# Altium PCB ChassisPowerDistribution_B_2.0_RW.PcbDoc (part 2 of 2)
Units mil, origin at the board's own origin, x right, y up, seen from the top; angles counter-clockwise.
Board outline 15750 x 2250 mil, 4 copper layers (Top Layer, Mid Top Layer, Mid Bottom Layer, Bottom Layer), stack 23.756 mil thick; 164 components, 75 nets, 526 pads, 63 vias.
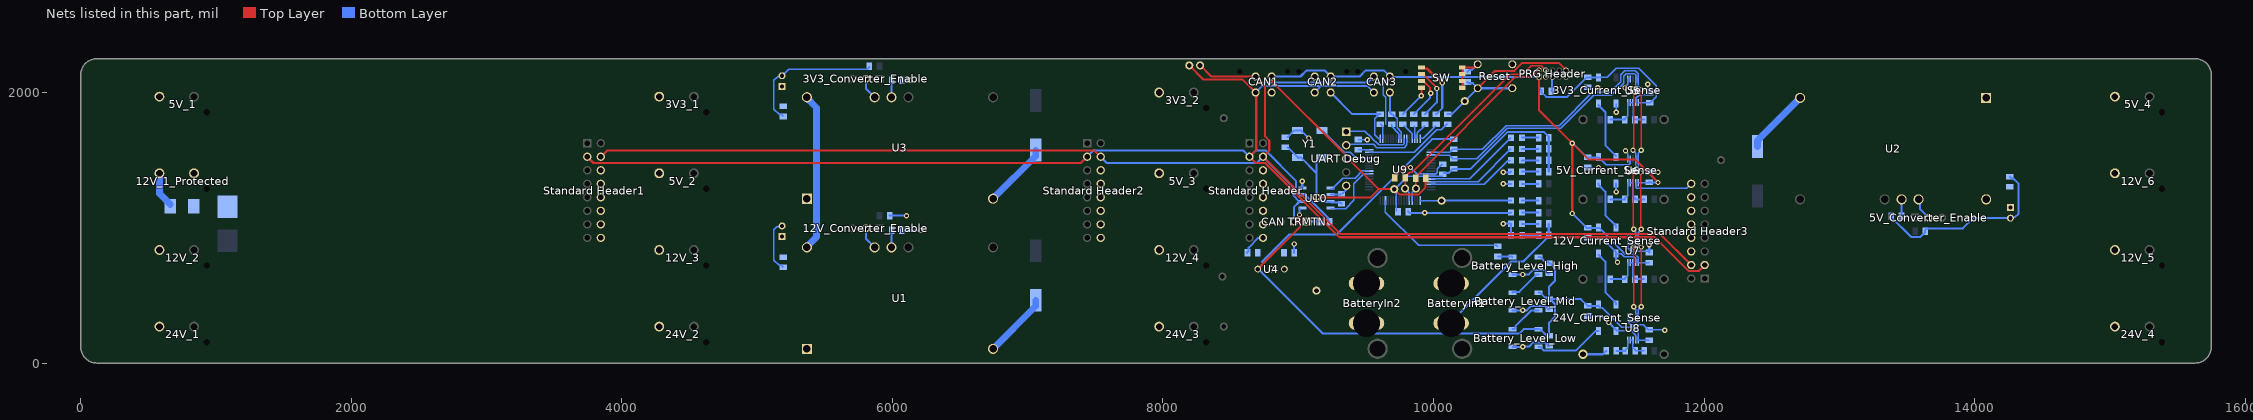
[diagram p4: the nets of this part, all layers, seen from the top]

## Via types
v1: diameter 39.37, hole 19.68, Top Layer to Bottom Layer, 47 vias
v2: diameter 240, hole 126, Top Layer to Bottom Layer, 16 vias

## Nets (pads, with @x,y where several pads share a name; then routed paths per layer and width w, separated by ;. In a path a pad name is that pad's centre, name@x,y a point inside that pad or via, vN(x,y) a via of type N, cw(c..) or ccw(c..) an arc to the next point about the centre after c; other vN are vias at no path point) (continued)
+5: 3V3_Current_Sense.1 5V_Board.1 5V_Current_Sense.1 12V_Current_Sense.1 24V_Current_Sense.1 "CAN PWR.1" "PRG Header.1" "UART Debug.3" Battery_Level_High.1 Battery_Level_Low.1 Battery_Level_Mid.1 C11.2 C16.2 C17.2 C18.2 C19.2 C20.1 C21.1 C22.1 C25.1 C26.2 C27.1 C28.1 C29.1 C30.1 C31.1 C32.1 C33.1 C34.1 C35.2 CAN1.2 CAN2.2 CAN3.2 R20.2 R21.1 R31.1 R32.2 R33.2 R34.2 R36.2 U4.3 U5.6 U6.2 U6.6 U7.6 U8.6 U9.11 U9.26 U9.50 U9.56 U10.3 U10.5 Y1.1 Y1.4 | length 18502.8
  Top Layer w15: U4.3@8701.57,695 9015.03,1008.45 v1@9015.03,1092.67 ; CAN1.2@8803.11,2118.11 8809.62,2111.6 8809.62,2080.38 9346.19,1543.81 9346.19,1531.26 9352.45,1525 9355,1525 9595,1285 ; v1(9010,1095) v1@9014.66,1090.34 ; 9135,1225 9535,1225 9595,1285 ; R36.2@9942.4,1365 9942.4,1298.05 9888.85,1244.5 9750.5,1244.5 5V_Board.1@9710,1285 9595,1285 ; 10780,2115 10780,1870 v1(11025,1625) v1@11025.78,1624.22 ; v1@11025.78,1105.78 v1@11025.78,1624.22 ; v1(11660,1335) 11490,1505 11145,1505 v1@11025.78,1624.22
  Bottom Layer w11: C25.1@9607.5,1765 9610.26,1765 9625.43,1749.83 U9.50@9625.43,1657.91 ; 9650,1765 9648.56,1766.44 9648.56,1966.44 9630,1985 9630,2070 CAN3.2@9677.72,2117.72 ; C22.1@9690,1765 9690,1749.23 9743.26,1695.98 9743.26,1658.19 U9.56@9743.54,1657.91 ; C21.1@9723.85,1121.25 U9.26@9723.85,1201.15 9723.85,1257.89 9710,1271.74 5V_Board.1@9710,1285 9715,1285 9810.32,1380.32 U9.11@9981.76,1380.32 C20.1@10070,1380.32 ; 3V3_Current_Sense.1@11219.13,2112.4 3V3_Current_Sense.1@11220.08,2111.46 11283.66,2111.46 11350.48,2178.27 11516.73,2178.27 11645,2050 11645,1968.11 11601.89,1925 C16.2@11600,1925 U5.6@11514.06,1925 ; 24V_Current_Sense.1@11220.04,419.65 24V_Current_Sense.1@11220.04,421.14 ; 24V_Current_Sense.1@11220.04,431.46 24V_Current_Sense.1@11220.04,421.14 ; 5V_Current_Sense.1@11220.08,1521.46 11276.01,1465.52 11443.67,1465.52 11454.72,1476.57 U6.2@11454.72,1507.32 ; 12V_Current_Sense.1@11221.81,1003.19 11419,806 11488.39,806 11513.78,780.61 11513.78,742.68 U7.6@11514.06,742.4 C18.2@11594.8,742.4 ; U8.6@11514.06,170 C19.2@11595,170 ; U8.6@11514.06,170.56 11514.06,225.46 11474.52,265 11390,265 11246.08,408.92 11232.26,408.92 24V_Current_Sense.1@11220.04,421.14 ; U6.6@11514.06,1332.4 C17.2@11589.8,1332.4
  Bottom Layer w15: U4.3@8701.57,695 8705,695 9183.26,216.74 10632.82,216.74 10666.03,249.96 Battery_Level_Low.1@10776.46,249.96 ; 8732.4,747.4 8935,950 9285,950 9620,1285 ; CAN1.2@8803.11,2118.11 9017.2,2118.11 9062.7,2163.61 9194.72,2163.61 CAN2.2@9240.22,2118.11 9454.31,2118.11 9499.81,2163.61 9631.83,2163.61 CAN3.2@9677.33,2118.11 ; C26.2@8921.89,1595 Y1.1@9000.39,1516.5 ; Y1.1@9003.9,1520 9019.65,1520 9135,1404.65 ; v1(9010,1095) U10.5@9010,1140.69 ; Y1.4@9185,1520 Y1.4@9175,1520 9169.25,1520 9135,1485.75 9135,1404.65 ; C27.1@9320,1177.6 9311.91,1185.69 9243.64,1185.69 9239.33,1190 9174.25,1190 9139.25,1225 9135,1225 9135,1404.65 ; CAN3.2@9680.44,2115 10780,2115 10780,2034.49 C35.2@10797.6,2016.89 ; 5V_Board.1@9710,1285 9620,1285 ; C20.1@10079.68,1404.68 10112.6,1404.68 10143.11,1435.2 R20.2@10150,1435.2 10274.07,1435.2 10548.18,1709.31 10815.96,1709.31 10852.13,1673.14 R34.2@10852.13,1666.25 R33.2@10852.13,1582.5 R32.2@10852.13,1498.75 R31.1@10852.13,1415 ; R21.1@10150,1654.8 9989.8,1654.8 9620,1285 ; Battery_Level_Mid.1@10776.46,519.96 10788.27,519.96 10835.83,472.4 C29.1@10855,472.4 ; Battery_Level_High.1@10776.46,784.96 10788.27,784.96 10822.66,750.57 10841.83,750.57 C28.1@10855,737.4 10861.89,737.4 10898.06,701.23 10898.06,609.16 10855,566.1 C29.1@10855,472.4 ; Battery_Level_Low.1@10788.27,249.96 10822.66,215.57 10841.83,215.57 C30.1@10855,202.4 10855,298.6 10898.06,341.66 10898.06,436.23 C29.1@10861.89,472.4 ; C35.2@10797.6,2010 10797.6,2003.11 10833.77,1966.94 10987.65,1966.94 11133.11,2112.4 C34.1@11140,2112.4 3V3_Current_Sense.1@11219.13,2112.4 ; v1@11028.11,1105 11133.11,1000 C32.1@11140,1000 12V_Current_Sense.1@11218.62,1000 ; v1@11028.11,1625 11133.11,1520 C33.1@11140,1520 5V_Current_Sense.1@11218.62,1520 ; 24V_Current_Sense.1@11219.57,422.4 C31.1@11140,422.4 11090,472.4 C29.1@10861.89,472.4 ; C17.2@11595,1337.6 11596.3,1336.3 11658.7,1336.3 v1(11660,1335) ; C29.1@10855,472.4 C29.1@10861.89,472.4
  other v1: 11026.56,1105
Battery_LEDs: R35.1 U9.30 | length 1021.8
  Bottom Layer w11: U9.30@9645,1201.15 9645,1115 9890,870 10465,870 R35.1@10475,860
CANH: "Standard Header1.3" "Standard Header2.3" "Standard Header3.3" "Standard Header.3" CAN1.3 CAN2.3 CAN3.3 CANH.1 R38.2 U10.7 | length 11648.7
  Top Layer w15: 3745,1525 3791.01,1478.99 7393.99,1478.99 7440,1525 ; CANH.1@8195,2200 8299.89,2095.11 8589.89,2095.11 CAN1.3@8685,2000 8690,1995 8690,1575 8640,1525 8686.01,1478.99 8756.01,1478.99 9305,930 11634.93,930 11885.94,678.99 11958.99,678.99 12005,725
  Bottom Layer w15: 7440,1525 7486.01,1571.01 8593.99,1571.01 8640,1525 8686.01,1571.01 8759.06,1571.01 8985,1345.07 8985,1267.95 9012.95,1240 U10.7@9030.67,1240 ; CAN1.3@8685,2000 8734.61,2049.61 9171.72,2049.61 ; U10.7@9030.67,1245 9034.98,1240.69 9054.31,1240.69 9219.23,1075.77 9219.23,1058.17 R38.2@9232.4,1045 ; CAN2.3@9122.11,2000 9171.72,2049.61 ; CAN3.3@9559.22,2000 9509.61,2049.61 9171.72,2049.61
CANL: "CAN TRMTN.2" "Standard Header1.4" "Standard Header2.4" "Standard Header3.4" "Standard Header.4" CAN1.4 CAN2.4 CAN3.4 CANL.1 U10.6 | length 11174.5
  Top Layer w15: 3845,1525 3891.01,1571.01 7493.99,1571.01 7540,1525 ; CANL.1@8275,2200 8356.89,2118.11 CAN1.4@8685,2118.11 8755,2048.11 8755,1675.07 8786.01,1644.06 8786.01,1571.01 8740,1525 8742.53,1525 9314.53,953 11677,953 11905,725
  Bottom Layer w15: 7540,1525 7586.01,1478.99 8693.99,1478.99 8740,1525 8960,1305 8960,1242.95 U10.6@9012.95,1190 ; CAN1.4@8685,2118.11 8730.5,2072.61 9162.19,2072.61 ; 8970,1045 8970,1155 9005.69,1190.69 9008.64,1190.69 9010,1192.05 U10.6@9010,1195 ; U10.6@9012.95,1195 U10.6@9030.67,1195 ; CAN2.4@9122.11,2118.11 9167.22,2073 ; 9162.97,2072.61 9513.72,2072.61 CAN3.4@9559.22,2118.11
CANRX: U9.39 U10.4 | length 466.4
  Bottom Layer w11: U10.4@9239.33,1140 9349.72,1140 9411.78,1202.06 9411.78,1326.78 9485,1400 U9.39@9525,1400
CANTX: U9.40 U10.1 | length 340.8
  Bottom Layer w11: U10.1@9239.33,1290 9257.05,1290 9263.36,1296.31 9263.36,1298.36 9330,1365 9420,1365 9474.96,1419.96 9524.72,1419.96 U9.40@9525,1419.69
Current_Sensor_SCL: R21.2 U5.5 U6.5 U7.5 U8.2 U8.5 U9.2 | length 3796.2
  Top Layer w11: v1(11530,1408.19) 11532.5,1405.69 11532.5,992.5 v1(11535,990) ; v1(11535,415) v1(11535,858.19) ; v1(11535,1571.81) 11537.38,1574.19 11537.38,2017.62 v1(11539.76,2020)
  Bottom Layer w11: U9.2@9981.76,1557.48 10120.59,1557.48 10143.11,1580 R21.2@10150,1580 10362.31,1580 10537.31,1755 10930,1755 11175,2000 11305,2000 11385,2080 11385,2130 11414.27,2159.27 11492.91,2159.27 11513.78,2138.41 U5.5@11513.78,2100.48 ; U8.2@11455.28,344.92 11455.28,314.17 11464.33,305.12 11504.73,305.12 11513.78,314.17 11513.78,334.92 U8.5@11513.78,344.92 ; U8.5@11514.06,345.2 11514.06,394.06 v1(11535,415) ; U5.5@11514.06,2100.2 11514.06,2045.7 v1(11539.76,2020) ; v1(11530,1408.19) 11530,1412.87 11514.06,1428.81 U6.5@11514.06,1507.6 11514.06,1550.67 11535,1571.62 v1(11535,1571.81) ; v1(11535,858.19) 11533.98,858.19 11514.06,878.11 11514.06,961.38 11535,982.32 v1(11535,990)
Current_Sensor_SDA: R20.1 U5.4 U6.4 U7.2 U7.4 U8.4 U9.3 | length 3702.5
  Top Layer w11: v1(11475,1408.19) 11477.5,1405.69 11477.5,992.5 v1(11480,990) ; v1(11475,1571.81) 11480,1576.81 11480,2000 v1(11485,2005) ; v1(11480,858.19) 11480.64,857.55 v1@11480.64,416.92
  Bottom Layer w11: U9.3@9981.76,1537.8 10115.31,1537.8 10143.11,1510 R20.1@10150,1510 10319.18,1510 10544.18,1735 10940,1735 11185.57,1980.57 11315.57,1980.57 11405,2070 11405,2120.31 11424.96,2140.27 11485.04,2140.27 11494.09,2131.22 U5.4@11494.09,2100.48 ; U7.2@11455.28,917.32 11455.28,884.64 11478.06,861.85 11480,861.85 11480,863.36 11494.37,877.73 11494.37,967.95 11480,982.32 v1(11480,990) ; v1(11475,1408.19) 11475,1409.44 11494.37,1428.81 U6.4@11494.37,1507.6 11494.37,1550.67 11475,1570.04 v1(11475,1571.81) ; v1@11481.28,408.6 11494.37,395.51 U8.4@11494.37,345.2 ; v1(11485,2005) 11485,2012.68 11494.37,2022.05 U5.4@11494.37,2100.2
  other v1: 11481.28,416.28
Dip1: R22.2 U9.61 | length 127.2
  Bottom Layer w11: R22.2@9775,1750 9787.66,1750 9841.68,1695.98 9841.68,1658.19 U9.61@9841.96,1657.91
Dip2: R23.2 U9.62 | length 94.8
  Bottom Layer w11: R23.2@9855,1750 9861.65,1743.35 U9.62@9861.65,1657.91
Dip3: R24.2 U9.63 | length 117.3
  Bottom Layer w11: U9.63@9881.4,1657.98 9881.4,1700.79 R24.2@9934.06,1753.44
Dip4: R25.2 U9.64 | length 155.9
  Bottom Layer w11: U9.64@9901.42,1660 9923.11,1660 10013.11,1750 R25.2@10020,1750
GND: 3V3_1.1 3V3_2.1 3V3_Current_Sense.3 5V_1.1 5V_2.1 5V_3.1 5V_4.1 5V_Current_Sense.3 12V_1_Protected.1 12V_2.1 12V_3.1 12V_4.1 12V_5.1 12V_6.1 12V_Current_Sense.3 24V_1.1 24V_2.1 24V_3.1 24V_4.1 24V_Current_Sense.3 "3.3V O.1" "5V O.1" "5V PWR.1" "12V O.1" "24V O.1" "PRG Header.3" "PRG Header.5" "PRG Header.9" "PWR In.1" "Standard Header1.6" "Standard Header1.8" "Standard Header1.10" "Standard Header1.12" "Standard Header1.14" "Standard Header1.16" "Standard Header2.6" "Standard Header2.8" "Standard Header2.10" "Standard Header2.12" "Standard Header2.14" "Standard Header2.16" "Standard Header3.6" "Standard Header3.8" "Standard Header3.10" "Standard Header3.12" "Standard Header3.14" "Standard Header3.16" "Standard Header.6" "Standard Header.8" "Standard Header.10" "Standard Header.12" "Standard Header.14" "Standard Header.16" "UART Debug.5" Battery_Level_High.3 Battery_Level_Low.3 Battery_Level_Mid.3 BatteryIn1.1 BatteryIn2.1 C1.2 C2.1 C3.2 C4.2 C5.1 C6.2 C7.2 C8.1 C9.2 C10.1 C11.1 C16.1 C17.1 C18.1 C19.1 C20.2 C21.2 C22.2 C23.1 C24.2 C25.2 C26.1 C27.2 C28.2 C29.2 C30.2 C31.2 C32.2 C33.2 C34.2 C35.1 CAN1.1 CAN2.1 CAN3.1 D1.2 GND.1 R1.1 R2.2 R3.1 R4.2 R5.1 R6.2 R37.1 Reset.1a Reset.1b SW.1 SW.2 SW.3 SW.4 U1.1 U1.7 U2.1 U2.7 U3.1 U3.7 U4.2 U5.1 U5.2 U5.7 U6.1 U6.7 U7.1 U7.7 U8.1 U8.7 U9.10 U9.17 U9.49 U9.57 U10.2 U10.8 Y1.2 | length 12995.1
  Top Layer w11: R37.1@9715.2,1370 9715.2,1376.89 9788.43,1450.12 9824.88,1450.12 v1(9829.88,1445.12) ; SW.1@10212.28,2035 SW.2@10212.28,2085 SW.3@10212.28,2135 SW.4@10212.28,2185
  Top Layer w15: SW.4@10212.28,2185 10306.3,2185 Reset.1a@10328.46,2207.17
  Bottom Layer w11: D1.2@662.99,1160 D1.2@662.99,1171.5 ; C1.2@5185,1013.74 5177.31,1006.05 5146.05,1006.05 5125,985 5125,760 5162.23,722.77 5179.83,722.77 C2.1@5195,707.6 ; C5.1@5195,1822.6 5179.83,1837.77 5162.23,1837.77 5125,1875 5125,2090 5151.05,2116.05 5177.31,2116.05 C4.2@5185,2123.74 5234.2,2172.94 5815.03,2172.94 5830.2,2188.11 R5.1@5830.2,2195 ; R6.2@6069.8,2090 v1(6130,2090) ; C24.2@9445,1652.4 9447.4,1650 v1(9510,1650) ; C25.2@9600.61,1839.8 9566.44,1805.63 9566.44,1688.56 9597.09,1657.91 U9.49@9605.74,1657.91 ; C22.2@9690,1839.8 9696.89,1839.8 9731.44,1805.25 9731.44,1738.74 9763.22,1706.96 U9.57@9763.22,1657.91 ; v1(9829.88,1445.12) 9875,1400 U9.10@9981.76,1400 ; U9.17@9901.02,1200 GND.1@10060,1200 ; U9.10@9982.04,1400.28 10019.83,1400.28 10028.94,1409.39 10028.94,1435.63 C20.2@10063.11,1469.8 ; C33.2@11140,1445.2 11219.8,1445.2 v1(11220,1445) ; C34.2@11140,2037.6 11142.6,2035 v1(11215,2035) ; 24V_Current_Sense.3@11349.96,238.54 11461.46,238.54 11494.09,205.91 U8.7@11494.09,170.28 ; 12V_Current_Sense.3@11350,808.54 11389.59,808.54 11411.13,787 11480.52,787 11494.09,773.43 11494.09,742.68 U7.7@11494.37,742.4 ; v1(11350,1855) 3V3_Current_Sense.3@11350,1918.54 ; v1(11415.97,2034.03) 11415.97,2041.71 11434.91,2060.66 11434.91,2099.79 U5.1@11435.32,2100.2 U5.2@11455,2100.2 ; v1(11420,1570) 11420,1567.32 11435.31,1552.01 U6.1@11435.31,1507.6 ; U8.1@11435.32,345.2 11435.32,307.27 11458.58,284 11549.6,284 C19.1@11591.9,241.7 ; U7.1@11435.31,917.6 11435.31,852.75 11463.07,825 11587.4,825 C18.1@11595,817.4 ; U8.7@11494.09,160.28 U8.7@11494.37,160 ; U5.7@11494.09,1925.28 11494.09,1956.03 ; U6.7@11494.37,1332.4 11494.65,1332.12 11494.65,1301.38 11503.7,1292.33 11871.19,1292.33 11903.86,1325 11905,1325 ; U5.7@11494.37,1925 11494.65,1925.28 11494.65,1956.03 11523.26,1984.63 11584.83,1984.63 C16.1@11600,1999.8 11585,2014.8 v1(11585,2060) ; C19.1@11595,244.8 11595.2,245 11708.62,245 v1(11710.72,242.9) ; C17.1@11595,1412.4 11597.4,1410 v1(11660,1410)
  Bottom Layer w15: R1.1@5979.8,1090 v1(6105,1090) ; R2.2@6069.8,980 v1(6210,980) ; C11.1@8620.2,815 8633.37,828.17 8633.37,853.3 8705.07,925 ; 8705,925 8705.07,925 ; 8740,925 8705.07,925 ; C26.1@8921.89,1669.8 8972.09,1720 9019.65,1720 9075.61,1664.03 v1(9077.07,1664.03) ; C10.1@8970,815 v1(8970,880) ; v1(9030,1345) 9030,1295.67 U10.8@9030.67,1295 ; CAN2.1@9240.22,2000 9400.42,1839.8 9600.61,1839.8 C25.2@9607.5,1839.8 ; U10.2@9243.64,1244.31 C27.2@9311.91,1244.31 ; C27.2@9326.89,1252.4 9355,1280.51 9355,1320 ; CAN3.1@9677.33,2000 9677.33,1852.47 C22.2@9690,1839.8 ; C21.2@9812.4,1120 9822.4,1110 v1(9935,1110) 10569.82,1110 10572.32,1112.5 ; GND.1@10060,1201.25 10572.32,1201.25 ; C23.1@10250,2152.4 10263.17,2165.57 10284.04,2165.57 Reset.1a@10327.05,2208.58 ; v1(10515,1030) 10571.07,1030 10572.32,1028.75 10572.99,1028.08 10572.99,945.67 10573.66,945 ; v1(10515,1325) 10572.32,1325 ; v1(10515,1410) 10567.32,1410 10572.32,1415 ; Battery_Level_Low.3@10583.56,120.02 10664.98,120.02 10667.19,122.19 10707.19,122.19 10738.26,153.26 10822.45,153.26 10848.11,127.6 C30.2@10855,127.6 ; Battery_Level_Mid.3@10583.54,390.04 v1(10660,390.04) 10690.04,390.04 10723.26,423.26 10822.45,423.26 10848.11,397.6 C29.2@10855,397.6 ; Battery_Level_High.3@10583.54,655.04 v1(10660,655.04) 10705.04,655.04 10738.26,688.26 10822.45,688.26 10848.11,662.6 C28.2@10855,662.6 ; C35.1@10872.4,2010 10876.2,2013.8 10876.2,2115 ; C31.2@11140,347.6 11244.21,347.6 v1@11295,296.81 ; C32.2@11140.2,925 11245.35,925 11350,820.35 12V_Current_Sense.3@11350,813.54 ; v1(11295,300) 24V_Current_Sense.3@11353.21,241.79 ; 12V_Current_Sense.3@11350,808.54 11350,761.59 11360,751.59 v1(11360,745) ; v1(11350,1265) 5V_Current_Sense.3@11350,1328.54 ; C18.1@11595,817.4 v1(11595,875) ; U2.7@12710,1959.45 U2.7@12710,1960 ; R4.2@13385.2,1085 13385.2,1078.11 13531.37,931.94 13598.63,931.94 13634.8,968.11 R3.1@13634.8,975 13634.8,981.89 13647.97,995.06 13913.49,995.06 13989.69,1071.26 C7.2@14265,1071.26 14271.92,1078.18 14298.18,1078.18 14325,1105 14325,1325 14285.77,1364.23 14273.17,1364.23 C8.1@14260,1377.4
  Bottom Layer w50: 12V_1_Protected.1@582.2,1402.62 582.2,1252.28 D1.2@662.99,1171.5 ; U1.7@6744.25,104.8 7060,420.55 C3.2@7060,463.86 ; U3.7@6744.25,1214.8 7060,1530.55 C9.2@7060,1573.86 ; C6.2@12395,1601.14 12395,1644.45 U2.7@12710,1959.45
  other v1: 10660,120
"LED CAN": CAN.1 U9.14 | length 658.8
  Bottom Layer w10: U9.14@9981.76,1321.26 10376.26,1321.26 10550,1495 CAN.1@10568.57,1495
"LED Debug": Debug.1 U9.13 | length 690.6
  Bottom Layer w10: U9.13@9981.76,1340.94 10330.77,1340.94 Debug.1@10572.32,1582.5
"LED Fault": Fault.1 U9.12 | length 717.2
  Bottom Layer w11: U9.12@9981.76,1360.63 10266.7,1360.63 Fault.1@10572.32,1666.25
"Net3.3V O_2": "3.3V O.2" R30.2 | length 122.3
  Bottom Layer w15: 10655,1325 R30.2@10777.32,1325
Net3V3_Converter_Enable_2: 3V3_Converter_Enable.2 U3.3 | length 161.6
  Bottom Layer w15: 3V3_Converter_Enable.2@5805,2100 5805,2028.46 U3.3@5868.66,1964.8
Net3V3_Current_Sense_4: 3V3_Current_Sense.4 5V_Current_Sense.2 | length 430.5
  Bottom Layer w15: 3V3_Current_Sense.4@11220.08,1906.73 11271.15,1855.66 11271.15,1608.85 5V_Current_Sense.2@11350,1530
"Net5V O_2": "5V O.2" R29.2 | length 122.3
  Bottom Layer w15: 10655,1201.25 R29.2@10777.32,1201.25
"Net5V PWR_2": "5V PWR.2" R31.2 | length 122.3
  Bottom Layer w15: 10655,1415 R31.2@10777.32,1415
Net5V_Converter_Enable_2: 5V_Converter_Enable.2 U2.3 | length 165.8
  Bottom Layer w15: U2.3@13585.59,1210 13596.82,1198.77 13596.82,1138.18 5V_Converter_Enable.2@13660,1075
Net5V_Current_Sense_4: 5V_Current_Sense.4 12V_Current_Sense.2 | length 380.9
  Bottom Layer w15: 5V_Current_Sense.4@11220.08,1328.54 11220.08,1316.73 11270,1266.81 11270,1093.27 11350,1013.27 12V_Current_Sense.2@11350,1001.46
"Net12V O_2": "12V O.2" R28.1 | length 122.3
  Bottom Layer w15: 10655,1112.5 R28.1@10777.32,1112.5
Net12V_1_Protected_2: 12V_1_Protected.2 D1.1 F13.2
Net12V_Converter_Enable_2: 12V_Converter_Enable.2 U1.3 | length 166.6
  Bottom Layer w15: 12V_Converter_Enable.2@5805,995 5805,918.46 U1.3@5868.66,854.8
Net12V_Current_Sense_4: 12V_Current_Sense.4 24V_Current_Sense.2 | length 422.3
  Bottom Layer w15: 12V_Current_Sense.4@11220.08,799.92 11271.23,748.77 11271.23,522 11349.96,443.27 24V_Current_Sense.2@11349.96,431.46
"Net24V O_2": "24V O.2" R27.2 | length 122.3
  Bottom Layer w15: 10655,1028.75 R27.2@10777.32,1028.75
Net24V_Current_Sense_4: 24V_Current_Sense.4 Battery_Level_Low.2 | length 516.4
  Bottom Layer w15: Battery_Level_Low.2@10776.46,120.04 10788.27,120.04 10816.88,91.43 11051.43,91.43 11198.54,238.54 24V_Current_Sense.4@11220.04,238.54
NetBattery_Level_High_2: Battery_Level_High.2 Battery_Level_Mid.4 | length 248.9
  Bottom Layer w15: Battery_Level_Mid.4@10583.54,519.96 10589.55,525.96 10635.57,525.96 10764.65,655.04 Battery_Level_High.2@10776.46,655.04
NetBattery_Level_High_4: Battery_Level_High.4 R35.2 | length 107.8
  Bottom Layer w15: R35.2@10476.32,786.28 10582.22,786.28 Battery_Level_High.4@10583.54,784.96
NetBattery_Level_Low_4: Battery_Level_Low.4 Battery_Level_Mid.2 | length 257.4
  Bottom Layer w15: Battery_Level_Low.4@10583.54,249.96 10595.35,249.96 10605.57,260.18 10605.57,271.18 10724.43,390.04 Battery_Level_Mid.2@10776.46,390.04
NetC12_1: C12.1 R11.1 U5.10 | length 241.1
  Bottom Layer w11: C12.1@11415.2,1800 11415.2,1806.89 11435.32,1827.01 U5.10@11435.32,1925
  Bottom Layer w15: R11.1@11307.4,1800 C12.1@11415.2,1800
NetC12_2: C12.2 R12.1 U5.8 U5.9 | length 215.8
  Bottom Layer w11: U5.9@11455,1925 U5.8@11474.69,1925 ; U5.8@11474.96,1924.72 11474.96,1815.04 C12.2@11490,1800
  Bottom Layer w15: C12.2@11490,1800 R12.1@11555.2,1800
NetC13_1: C13.1 R13.1 U6.10 | length 238.5
  Bottom Layer w11: C13.1@11415.2,1210 11415.2,1216.89 11435.31,1237.01 U6.10@11435.31,1332.4
  Bottom Layer w15: R13.1@11307.4,1210 C13.1@11415.2,1210
NetC13_2: C13.2 R14.1 U6.8 U6.9 | length 216
  Bottom Layer w11: U6.9@11455,1332.4 U6.8@11474.68,1332.4 11474.68,1232.2 11490,1216.89 C13.2@11490,1210
  Bottom Layer w15: C13.2@11490,1210 R14.1@11557.6,1210
NetC14_1: C14.1 R15.1 U7.10 | length 238.5
  Bottom Layer w11: C14.1@11415.2,620 11415.2,626.89 11435.31,647.01 U7.10@11435.31,742.4
  Bottom Layer w15: R15.1@11307.4,620 C14.1@11415.2,620
NetC14_2: C14.2 R16.1 U7.8 U7.9 | length 216
  Bottom Layer w11: U7.9@11455,742.4 U7.8@11474.68,742.4 11474.68,642.2 11490,626.89 C14.2@11490,620
  Bottom Layer w15: C14.2@11490,620 R16.1@11557.6,620
NetC15_1: C15.1 R17.1 U8.10 | length 145.6
  Bottom Layer w11: C15.1@11417.6,96.89 11435.32,114.61 U8.10@11435.32,170
  Bottom Layer w15: R17.1@11352.4,90 C15.1@11417.6,90
NetC15_2: C15.2 R18.1 U8.8 U8.9 | length 172.2
  Bottom Layer w11: U8.9@11455,170 U8.8@11474.69,170 11474.69,114.61 11492.4,96.89 C15.2@11492.4,90 R18.1@11557.6,90
NetC24_1: C24.1 U9.48 | length 80.2
  Bottom Layer w11: C24.1@9445,1577.6 9445.43,1577.17 U9.48@9525,1577.17
"NetCAN TRMTN_1": "CAN TRMTN.1" R38.1 | length 87.6
  Bottom Layer w15: 9070,1045 R38.1@9157.6,1045
NetCAN_2: CAN.2 R32.1 | length 122.3
  Bottom Layer w15: CAN.2@10655,1498.75 R32.1@10777.32,1498.75
NetDebug_2: Debug.2 R33.1 | length 122.3
  Bottom Layer w15: Debug.2@10655,1582.5 R33.1@10777.32,1582.5
NetFault_2: Fault.2 R34.1 | length 122.3
  Bottom Layer w15: Fault.2@10655,1666.25 R34.1@10777.32,1666.25
"NetPWR In_2": "PWR In.2" R26.1 | length 121
  Bottom Layer w15: 10656.34,945 R26.1@10777.32,945
NetR2_1: R2.1 U1.4 | length 124.9
  Bottom Layer w15: U1.4@5993.86,854.8 5994.43,855.37 R2.1@5994.43,979.43
NetR4_1: R4.1 U2.4 | length 125.2
  Bottom Layer w15: R4.1@13460,1085 13460.2,1085.2 13460.2,1209.8 U2.4@13460.39,1210
NetR6_1: R6.1 U3.4 | length 125.7
  Bottom Layer w15: U3.4@5993.86,1964.8 5994.43,1965.37 5994.43,2089.43 R6.1@5995,2090
NetR19_2: R19.2 U9.47 | length 666
  Bottom Layer w11: U9.47@9525,1557.48 9858.07,1557.48 10025.59,1725 10057.91,1725 10098.11,1765.2 R19.2@10105,1765.2
NetR22_1: R22.1 SW.8 | length 250.5
  Top Layer w15: v1(9910,1975) SW.8@9910,2032.72
  Bottom Layer w15: R22.1@9773.65,1838.65 v1(9910,1975)
NetR23_1: R23.1 SW.7 | length 332.5
  Top Layer w15: SW.7@9912.28,2085 9919.74,2077.54 9932.46,2077.54 9975.34,2034.66 9975.34,1999.66 v1(9980,1995)
  Bottom Layer w15: R23.1@9855,1839.8 9975.34,1960.14 9975.34,1990.34 v1(9980,1995)
NetR24_1: R24.1 SW.6 | length 385.6
  Top Layer w15: SW.6@9912.28,2135 9919.74,2127.54 9932.46,2127.54 10025,2035 v1(10025,2030)
  Bottom Layer w15: R24.1@9937.5,1839.8 10025,1927.3 v1(10025,2030)
NetR25_1: R25.1 SW.5 | length 449.2
  Top Layer w15: SW.5@9912.28,2185 9919.74,2177.54 9952.46,2177.54 10060,2070 v1(10065,2070)
  Bottom Layer w15: R25.1@10020,1839.8 10065,1884.8 v1(10065,2070)
Oscillator: U9.45 Y1.3 | length 425.1
  Bottom Layer w11: Y1.3@9182.5,1717.5 9340,1560 9382.24,1560 9385.46,1556.78 9424.13,1518.11 U9.45@9525,1518.11
Power_In: BatteryIn1.2 BatteryIn2.2 C1.1 C2.2 C4.1 C5.2 C7.1 C8.2 C10.2 Power_In.1 R10.1 R17.2 R26.2 R27.1 U1.2 U2.2 U3.2 U4.1 | length 2434.8
  Top Layer w50: BatteryIn2.2@9504.78,294.78 BatteryIn2.2@9505,294.55
  Bottom Layer w15: BatteryIn1.2@10124.78,299.78 10576.74,751.74 10665.76,751.74 10852.13,938.11 R26.2@10852.13,945 R27.1@10852.13,1028.75 ; R10.1@11105,65 11252.6,65 R17.2@11277.6,90
  Bottom Layer w50: U1.2@5368.66,854.8 5368.66,861.09 5440,932.42 5440,1887.18 5368.66,1958.52 U3.2@5368.66,1964.8
PRG_Clock: "PRG Header.4" PNG_Clock.1 R37.2 U9.21 | length 1583.3
  Top Layer w11: PNG_Clock.1@9790,1290 9790,1376.89 9825.05,1411.94 9843.63,1411.94 10566.69,2135 10660,2135 10723.5,2198.5 10796.5,2198.5 10830,2165
  Bottom Layer w11: PNG_Clock.1@9790,1290 9822.28,1257.72 U9.21@9822.28,1201.15
PRG_Data: "PRG Header.2" PRG_Data.1 R36.1 U9.20 | length 1426.2
  Top Layer w11: R36.1@9867.6,1365 9882.77,1380.17 9882.77,1392.03 10605.74,2115 10720,2115 10770,2165 10780,2165 ; PRG_Data.1@9870,1290 R36.1@9870,1365
  Bottom Layer w11: U9.20@9841.96,1201.15 9841.96,1261.39 9870,1289.43 PRG_Data.1@9870,1290
Reset: "PRG Header.10" C23.2 R19.1 Reset.1 Reset.2a Reset.2b | length 1407.5
  Top Layer w15: Reset.2a@10327.05,2031.42 10327.05,2032.05 10455,2160 10597.99,2160 10657.49,2219.5 10925.7,2219.5 10980,2165.2 10980,2165
  Bottom Layer w15: R19.1@10105,1840 10135.63,1840 Reset.1@10231.34,1935.71 Reset.2a@10327.05,2031.42 ; C23.2@10250,2077.6 10259.42,2068.18 10290.29,2068.18 Reset.2a@10327.05,2031.42 ; Reset.2b@10582.95,2031.42 Reset.2a@10327.05,2031.42 ; 10980,2165 10980,2165.2
UARTRX: "UART Debug.1" U9.58 | length 507.2
  Bottom Layer w11: 9360,1715 9491.93,1715 9543.19,1663.75 9543.19,1662.98 9594.24,1611.93 9774.72,1611.93 9782.63,1619.83 9782.63,1657.63 U9.58@9782.91,1657.91
UARTTX: "UART Debug.2" U9.59 | length 512.1
  Bottom Layer w11: 9355,1620 9356.77,1618.23 9467.44,1618.23 9468.86,1616.81 9558.19,1616.81 9582.07,1592.93 9782.59,1592.93 9802.31,1612.65 9802.31,1657.63 U9.59@9802.59,1657.91
pads on no net: 3V3_1.9 3V3_2.9 3V3_Converter_Enable.3 3V3_Current_Sense.2 5V_1.9 5V_2.9 5V_3.9 5V_4.9 5V_Converter_Enable.3 12V_1_Protected.9 12V_2.9 12V_3.9 12V_4.9 12V_5.9 12V_6.9 12V_Converter_Enable.3 24V_1.9 24V_2.9 24V_3.9 24V_4.9 "CAN TRMTN.3" "PRG Header.6" "PRG Header.7" "PRG Header.8" "UART Debug.4" BatteryIn1. BatteryIn2. CAN1. CAN1.7 CAN2. CAN2.7 CAN3. CAN3.7 U9.1 U9.4 U9.5 U9.6 U9.7 U9.8 U9.9 U9.22 U9.23 U9.24 U9.25 U9.27 U9.28 U9.31 U9.32 U9.33 U9.34 U9.35 U9.36 U9.38 U9.41 U9.42 U9.44 U9.46 U9.51 U9.52 U9.53 U9.54 U9.55 U9.60
copper on no net:
  other v2: 150,150 15600,150 1145,275 3845,275 4840,275 7540,275 11905,275 14605,275 1145,1975 3845,1975 4840,1975 7540,1975 11905,1975 14605,1975 150,2100 15600,2100

## Polygon pours and split planes (outlines as drawn)
Power_In on Bottom Layer "POWER_IN_L04_P027" (solid, pour order 27): 8940,670 8940,830 ccw(c8925,830) 8925,845 8870,845 ccw(c8870,830) 8855,830 8855,670 ccw(c8870,670) 8870,655 8925,655 ccw(c8925,670)
+5 on Bottom Layer "+5_L04_P042" (solid, pour order 42): 9580,1745 9580,1785 9715,1785 9715,1745
Power_In on Bottom Layer "POWER_IN_L04_P041" (solid, pour order 41): 14308.61,1119.41 14308.61,1309.41 ccw(c14293.61,1309.41) 14293.61,1324.41 14038.61,1324.41 ccw(c14038.6,1309.41) 14023.61,1309.41 14023.61,1119.41 ccw(c14038.61,1119.41) 14038.61,1104.41 14293.61,1104.41 ccw(c14293.61,1119.41)
Power_In on Bottom Layer "POWER_IN_L04_P040" (solid, pour order 40): 5425,775 5425,965 ccw(c5410,965) 5410,980 5155,980 ccw(c5155,965) 5140,965 5140,775 ccw(c5155,775) 5155,760 5410,760 ccw(c5410,775)
Power_In on Bottom Layer "POWER_IN_L04_P039" (solid, pour order 39): 5425,1885 5425,2075 ccw(c5410,2075) 5410,2090 5155,2090 ccw(c5155,2075) 5140,2075 5140,1885 ccw(c5155,1885) 5155,1870 5410,1870 ccw(c5410,1885)
+5 on Bottom Layer "+5_L04_P028" (solid, pour order 28): 8730,655 8675,655 cw(c8675,670) 8660,670 8660,830 cw(c8675,830) 8675,845 8730,845 cw(c8730,830) 8745,830 8745,670 cw(c8730,670)
5V_Converter_Out on Bottom Layer "5V_CONVERTER_OUT_L04_P029" (solid, pour order 29): 12350,1160 12350,1305 cw(c12365,1305) 12365,1320 13375,1320 cw(c13375,1305) 13390,1305 13390,1160 cw(c13375,1160) 13375,1145 12365,1145 cw(c12365,1160)
12V_Out on Bottom Layer "12V_OUT_L04_P026" (solid, pour order 26): 1145,985 800,985 ccw(c800,970) 785,970 785,795 ccw(c800,795) 800,780 1145,780 ccw(c1145,795) 1160,795 1160,970 ccw(c1145,970)
3V3_Converter_Out on Bottom Layer "3V3_CONVERTER_OUT_L04_P018" (solid, pour order 18): 7090,2025 6080,2025 ccw(c6080,2010) 6065,2010 6065,1865 ccw(c6080,1865) 6080,1850 7090,1850 ccw(c7090,1865) 7105,1865 7105,2010 ccw(c7090,2010)
12V_Converter_Out on Bottom Layer "12V_CONVERTER_OUT_L04_P015" (solid, pour order 15): 7090,920 6080,920 ccw(c6080,905) 6065,905 6065,755 ccw(c6080,755) 6080,740 7090,740 ccw(c7090,755) 7105,755 7105,905 ccw(c7090,905)
Net12V_1_Protected_2 on Bottom Layer "NET12V_1_PROTECTED_2_L04_P011" (solid, pour order 11): 1140,1075 800,1075 cw(c800,1090) 785,1090 785,1440 cw(c800,1440) 800,1455 875,1455 cw(c875,1440) 890,1440 890,1260 ccw(c905,1260) 905,1245 1145,1245 cw(c1145,1230) 1160,1230 1160,1095 cw(c1140,1095)
12V_Out on Mid Top Layer "12V_OUT_L02_P048" (solid, pour order 48): 799.95,1054.95 890,1054.95 15109.95,1054.95 ccw(c15109.95,1070) 15125,1070 15125,1440 cw(c15140,1440) 15140,1455 15330,1455 cw(c15330,1440) 15345,1440 15345,585 cw(c15329.96,584.99) 15329.95,569.95 800.05,569.95 cw(c800.05,585) 785,585 785,1040 cw(c799.95,1040)
5V_Out on Mid Top Layer "Mid Top Layer-5V_Out" (solid, pour order 55): 799.92,1765.08 1004.93,1765.07 cw(c1004.93,1750) 1020,1750 1020,1175 ccw(c1035,1175) 1035,1160 14715,1160 ccw(c14715,1175) 14730,1175 14730,1735 cw(c14745,1735) 14745,1750 15335,1750 ccw(c15335,1765) 15350,1765 15350,2220 ccw(c15335.01,2220.01) 15335,2235 14260,2235 ccw(c14259.99,2220.01) 14245,2220 14245,1665 cw(c14228.97,1664.99) 14228.96,1648.96 8701.04,1648.96 cw(c8701.03,1659.99) 8690,1660 ccw(c8675.02,1660.02) 8675.01,1674.99 8604.99,1674.99 ccw(c8604.97,1660.03) 8590,1660 cw(c8579.12,1659.98) 8579.11,1649.11 7501.04,1648.96 cw(c7501.03,1659.99) 7490,1660 ccw(c7475.01,1660.01) 7475,1675 7405,1675 ccw(c7404.98,1660.02) 7390,1660 cw(c7380.01,1659.98) 7379.99,1649.99 3805.01,1649.99 cw(c3805,1659.99) 3795,1660 ccw(c3780.02,1660.02) 3780,1675 3710,1675 ccw(c3709.97,1660.03) 3695,1660 cw(c3685.01,1659.99) 3684.99,1649.99 1520.01,1649.99 cw(c1520.01,1665) 1505,1665 1505,2220 ccw(c1490.02,2220) 1490.01,2234.99 799.98,2234.98 ccw(c799.98,2220) 785,2220 785,1780 ccw(c799.92,1780)
3V3_Out on Mid Top Layer "3V3_OUT_L02_P051" (solid, pour order 51): 11755,1775 11755,2220 ccw(c11740,2220) 11740,2235 4495,2235 ccw(c4495,2220) 4480,2220 4480,1765 ccw(c4495,1765) 4495,1750 11730,1750 ccw(c11730,1775)
24V_Out on Mid Top Layer "24V_OUT_L02_P046" (solid, pour order 46): 785,485 785,30 ccw(c800,30) 800,15 15330,15 ccw(c15330,30) 15345,30 15345,485 ccw(c15330,485) 15330,500 800,500 ccw(c800,485)
Power_In on Top Layer "POWER_IN_L01_P057" (solid, remove dead copper, pour order 57): 14021.46,1256.46 13688.54,923.54 cw(c13667.93,944.14) 13667.93,915 5325,915 ccw(c5325,900) 5310,900 5310,60 ccw(c5325,60) 5325,45 14125,45 ccw(c14125,60) 14140,60 14140,1250 ccw(c14125,1250) 14125,1265 14042.07,1265 ccw(c14042.07,1235.86)
GND on Mid Bottom Layer "GND_L03_P056" (solid, remove dead copper, pour order 56): 15725,2100 15725,150 cw(c15600,150) 15600,25 150,25 cw(c150,150) 25,150 25,2100 cw(c150,2100) 150,2225 15600,2225 cw(c15600,2100)

## Silkscreen, mask and mechanical layers (free items; w line width, h text height)
Bottom Overlay:
  lines w10: 10525,305 10905,305 ; 10525,570 10905,570 ; 10650,855 10650,895 10765,895 10765,855 ; 10525,35 10905,35 10905,855 10525,855 10525,35

## Text inside footprints (layer, text, board x,y; h text height)
C1: Bottom Overlay "+" at 5155.98,820.51 h59.06 r270
C4: Bottom Overlay "+" at 5155.98,1930.51 h59.06 r270
C7: Bottom Overlay "+" at 14294.02,1264.49 h59.06 r90
U9: Bottom Overlay "16" at 10051.03,1270.66 h19.68; Bottom Overlay "17" at 9922.38,1135.53 h19.68; Bottom Overlay "32" at 9615.38,1137.53 h19.68; Bottom Overlay "33" at 9479.38,1269.53 h19.68; Bottom Overlay "49" at 9617.38,1701.53 h19.68; Bottom Overlay "64" at 9918.38,1701.53 h19.68